# Altium PCB PCB1.PcbDoc
Units mil, origin at the board's own origin, x right, y up, seen from the top; angles counter-clockwise.
Board outline 1545 x 760 mil, 2 copper layers (Top Layer, Bottom Layer); 41 components, 50 nets, 203 pads, 69 vias.
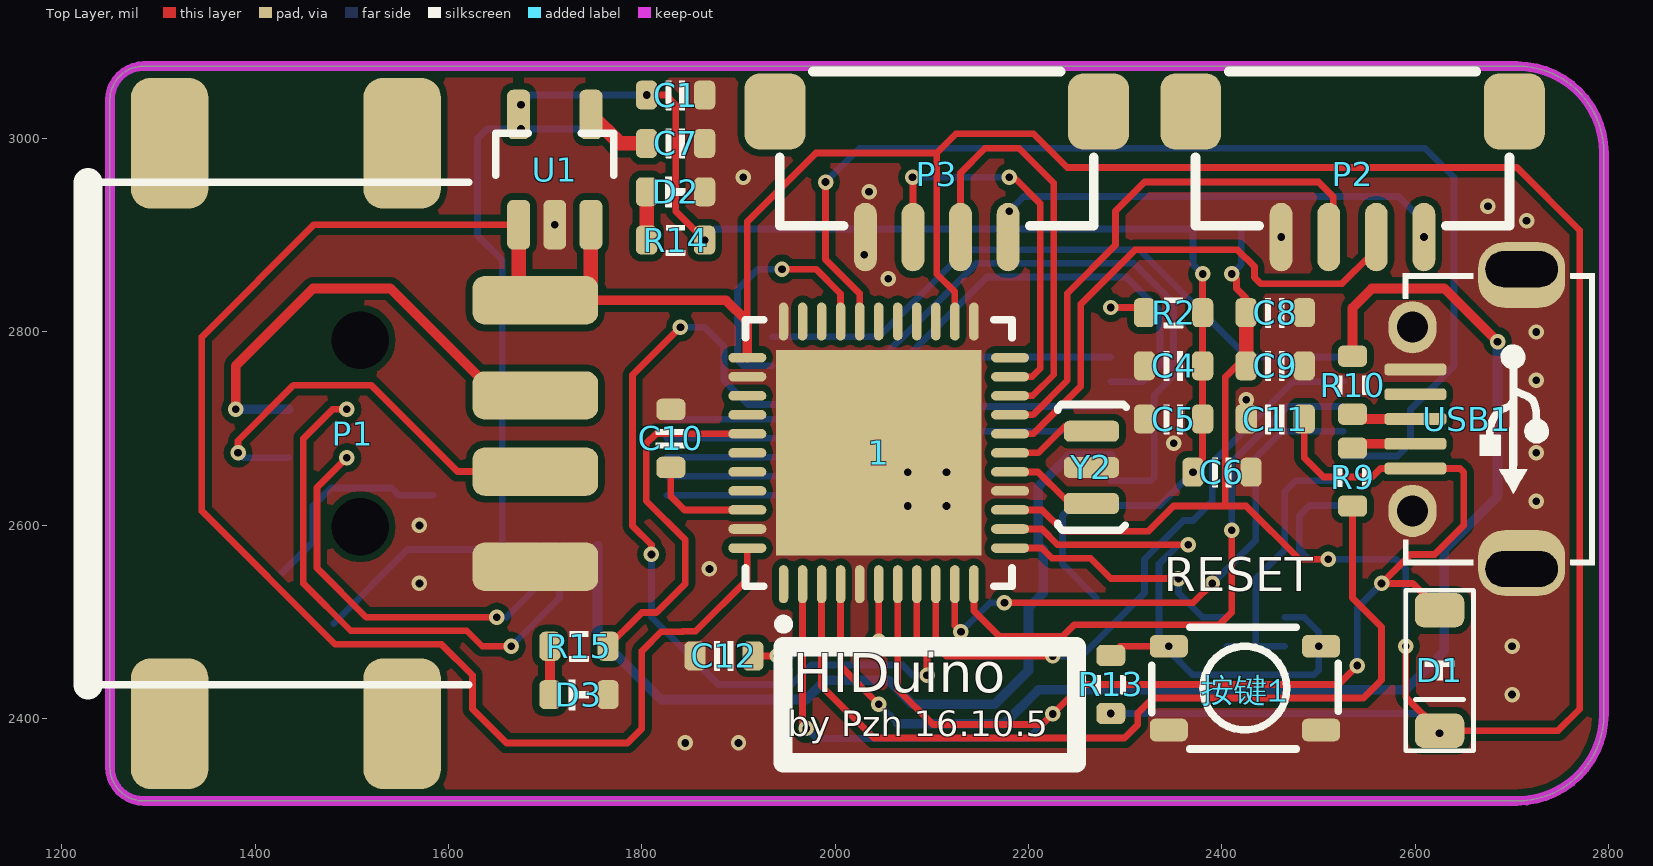
[diagram p0: Top Layer view]
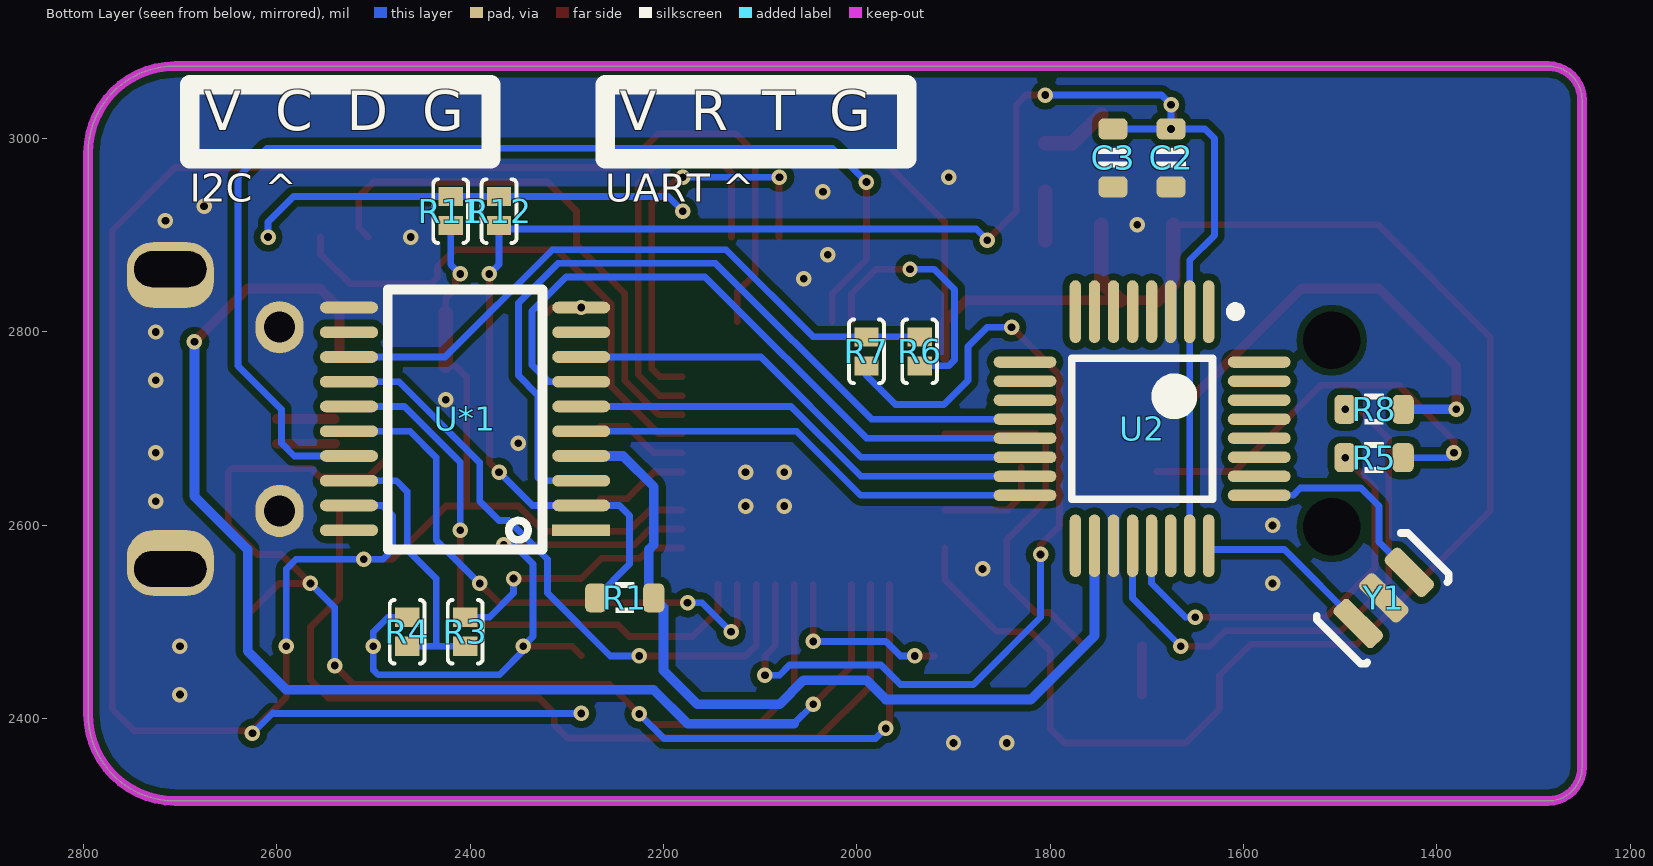
[diagram p1: Bottom Layer view, seen from below]
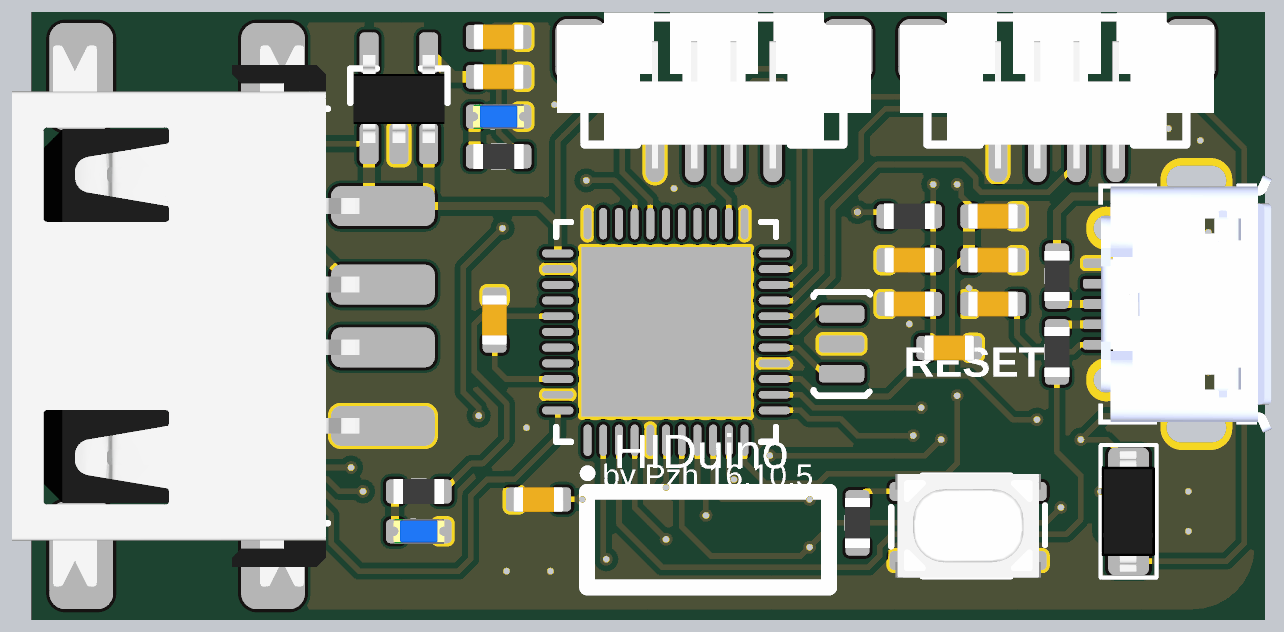
[diagram p2: 3D render of the assembled board from above, using the file's embedded part models]

## Layer stack, top to bottom
Top Solder: solder mask 0.4, Solder Resist, Dk 3.5
Top Layer: signal copper 1.4
Dielectric 1: dielectric 12.6, FR-4, Dk 4.8
Bottom Layer: signal copper 1.4
Bottom Solder: solder mask 0.4, Solder Resist, Dk 3.5

## Board outline
1285,2315 cw(c1285,2350) 1250,2350 1250,3040 cw(c1285,3040) 1285,3075 2705,3075 cw(c2705,2985) 2795,2985 2795,2405 cw(c2705,2405) 2705,2315

## Design rules (kind name [scope] priority, off if disabled: settings)
Clearance [All] p1: gap=7
ComponentClearance [All] p1: gap=0 collisioncheckmode=3 verticalgap=0 showdistances=FALSE
HoleSize [All] p1: absolutevalues=TRUE maxlimit=10000 minlimit=1 maxpercent=80.000 minpercent=20.000
MinimumSolderMaskSliver [All] p1: minsoldermaskwidth=1
PolygonConnect [All] p1: connectstyle=Direct reliefconductorwidth=10 reliefentries=4 polygonreliefangle="90 Angle" airgapwidth=10
RoutingVias [All] p1: holewidth=28 width=50 viastyle="Through Hole" minholewidth=28 minwidth=50 maxholewidth=28 maxwidth=50
SilkToSilkClearance [All] p1: silktosilkclearance=0
SilkToSolderMaskClearance [IsPad] p1: minsilkscreentomaskgap=0 clearancetoexposedcopper=TRUE
SolderMaskExpansion [All] p1: expansion=4
UnpouredPolygon [All] p1: allowunpoured=FALSE
Width [All] p1: maxlimit=10000 minlimit=7 preferedwidth=10
24 further rules are at their usual default settings.

## Components (designator, comment, footprint, x,y, rotation, side; value= is the part's Value field where it differs from the comment)
1 "ATmega32U4" QFN-44 2045,2675 r90 top
C1 "10uF" 0603-CAP 1835,3045 r180 top
C2 "0.1uF" 0603-CAP 1675,2980 r270 bottom
C3 "0.1uF" 0603-CAP 1735,2980 r270 bottom
C4 "0.1uF" 0603-CAP 2350,2765 r180 top
C5 "电容-0603" 0603-CAP 2350,2710 r180 top
C6 "0.1uF" 0603-CAP 2400,2655 r0 top
C7 "10nF" 0603-CAP 1835,2995 r180 top
C8 "4.7uF" 0603-CAP 2455,2820 r180 top
C9 "0.1uF" 0603-CAP 2455,2765 r180 top
C10 "0.1uF" 0603-CAP 1830,2690 r90 top
C11 "1uF" 0603-CAP 2455,2710 r0 top
C12 "0.1uF" 0603-CAP 1885,2465 r0 top
D1 "二极管-5819W" SOD-123 2625,2450 r270 top
D2 "LED-0603" 0603-LED-BLUE 1835,2945 r0 top
D3 "LED-0603" 0603-LED-BLUE 1735,2425 r0 top
P1 "USB-A" USB-SHORT 1375,2695 r180 top
P2 "HDR1x4_2.0" "接插件 4P" 2535,2910 r0 top
P3 "HDR1x4_2.0" "接插件 4P" 2105,2910 r0 top
R1 "2.2K" 0603-RES 2240,2525 r0 bottom
R2 "1K" 0603-RES 2350,2820 r180 top
R3 "电阻-0R" 0402-0R 2405,2490 r270 bottom
R4 "电阻-0R" 0402-0R 2465,2490 r270 bottom
R5 "22R" 0603-RES 1465,2670 r0 bottom
R6 "电阻-0R" 0402-0R 1935,2780 r90 bottom
R7 "电阻-0R" 0402-0R 1990,2780 r90 bottom
R8 "22R" 0603-RES 1465,2720 r0 bottom
R9 "22R" 0603-RES 2535,2650 r270 top
R10 "22R" 0603-RES 2535,2745 r90 top
R11 "电阻-0R" 0402-0R 2420,2925 r90 bottom
R12 "电阻-0R" 0402-0R 2370,2925 r90 bottom
R13 "4.7K" 0603-RES 2285,2435.5 r270 top
R14 "500R" 0603-RES 1835,2895 r180 top
R15 "500R" 0603-RES 1735,2475 r180 top
U1 "LP2992" SOT23-5 1710,2970 r90 top
U2 "MAX3421E" TQFP-32 1705,2700 r270 bottom
U*1 "TXS0108E" TSSOP-20 2285,2595 r0 bottom
USB1 "USB-Micro" USB_Micro-AB 2700,2710 r270 top
Y1 "12MHz" 晶振-3P 1455,2525 r135 bottom
Y2 "16MHz" 晶振-3P 2265,2660 r270 top
按键1 "Reset" SW-KEY2 2345,2475 r0 top

## Footprints (in the part's own frame and the unit in brackets; to place one, negate y for a bottom-side part, rotate by r counter-clockwise, add the part's x,y. Pads: shape width x height; smd on the part's side, far side on the other; paste and mask are expansions set on the pad)
0402-0R [mil] "选择焊盘"
  rect 19.68x25 smd: 1(-15,0) 2(15,0)
  silkscreen extent -33,-18 33,18
0603-CAP [mil]
  rrect50% 22x30 smd: 1(-30,0) 2(30,0)
  silkscreen extent -10,-15 10,15, body extent -31,-16 32,16, height 31
0603-LED-BLUE [mil]
  rrect50% 22x30 smd: 1(-30,0) 2(30,0)
  silkscreen extent -10,-16 10,16, body extent -32,-16 32,16, height 24
0603-RES [mil]
  rrect50% 22x30 smd: 1(-30,0) 2(30,0)
  silkscreen extent -10,-16 10,16, body extent -31,-16 31,16, height 18
QFN-44 [mm] "QFN, 44-Leads, Body 7.0x7.0mm (max), Pitch 0.50mm, IPC Low Density"
  oval 1x0.25 smd: 1(-3.45,2.5) 2(-3.45,2) 3(-3.45,1.5) 4(-3.45,1) 5(-3.45,0.5) 6(-3.45,0) 7(-3.45,-0.5) 8(-3.45,-1) 9(-3.45,-1.5) 10(-3.45,-2) 11(-3.45,-2.5) 23(3.45,-2.5) 24(3.45,-2) 25(3.45,-1.5) 26(3.45,-1) 27(3.45,-0.5) 28(3.45,0) 29(3.45,0.5) 30(3.45,1) 31(3.45,1.5) 32(3.45,2) 33(3.45,2.5)
  oval 0.25x1 smd: 12(-2.5,-3.45) 13(-2,-3.45) 14(-1.5,-3.45) 15(-1,-3.45) 16(-0.5,-3.45) 17(0,-3.45) 18(0.5,-3.45) 19(1,-3.45) 20(1.5,-3.45) 21(2,-3.45) 22(2.5,-3.45) 34(2.5,3.45) 35(2,3.45) 36(1.5,3.45) 37(1,3.45) 38(0.5,3.45) 39(0,3.45) 40(-0.5,3.45) 41(-1,3.45) 42(-1.5,3.45) 43(-2,3.45) 44(-2.5,3.45)
  rect 5.4x5.4 smd paste+0: ""(0,0)
  silkscreen extent -4.62,-3.5 3.5,3.5, body extent -3.5,-3.5 3.5,3.5, height 1
SOD-123 [mm]
  rrect50% 0.9x1.3 smd: 1(-1.583,0) 2(1.583,0)
  silkscreen extent -2.11,-0.89 2.11,0.89, body extent -1.92,-0.86 1.93,0.84, height 1.48
SOT23-5 [mm] "SOT23, 3-Leads, Body 3.1x3.0mm (max), Pitch 0.95mm, IPC Medium Density"
  rrect50% 1.3x0.6 smd: 1(-1.5,0.95) 2(-1.5,0) 3(-1.5,-0.95) 4(1.396,-0.95) 5(1.396,0.95)
  silkscreen extent -0.2,-1.55 0.9,1.55, body extent -1.48,-1.45 1.32,1.45, height 1.2
SW-KEY2 [mm]
  rrect50% 1x0.6 smd: 1(0,0) 1(4,0) 2(0,-2.2) 2(4,-2.2)
  silkscreen extent -0.45,-2.7 4.45,0.5, body extent -0.31,-2.74 4.33,0.56, height 2
TQFP-32 [mm]
  oval 1.65x0.3 smd: 1(-3.075,1.75) 2(-3.075,1.25) 3(-3.075,0.75) 4(-3.075,0.25) 5(-3.075,-0.25) 6(-3.075,-0.75) 7(-3.075,-1.25) 8(-3.075,-1.75) 17(3.075,-1.75) 18(3.075,-1.25) 19(3.075,-0.75) 20(3.075,-0.25) 21(3.075,0.25) 22(3.075,0.75) 23(3.075,1.25) 24(3.075,1.75)
  oval 0.3x1.65 smd: 9(-1.75,-3.075) 10(-1.25,-3.075) 11(-0.75,-3.075) 12(-0.25,-3.075) 13(0.25,-3.075) 14(0.75,-3.075) 15(1.25,-3.075) 16(1.75,-3.075) 25(1.75,3.075) 26(1.25,3.075) 27(0.75,3.075) 28(0.25,3.075) 29(-0.25,3.075) 30(-0.75,3.075) 31(-1.25,3.075) 32(-1.75,3.075)
  silkscreen extent -3.2,-1.85 1.85,2.57, body extent -2.5,-2.5 2.5,2.5, height 1.2
TSSOP-20 [mil]
  rect 60x12 smd: 1(0,0)
  oval 60x12 smd: 2(0,-25.59) 3(0,-51.18) 4(0,-76.77) 5(0,-102.36) 6(0,-127.95) 7(0,-153.54) 8(0,-179.13) 9(0,-204.72) 10(0,-230.32) 11(240.16,-230.32) 12(240.16,-204.72) 13(240.16,-179.13) 14(240.16,-153.54) 15(240.16,-127.95) 16(240.16,-102.36) 17(240.16,-76.77) 18(240.16,-51.18) 19(240.16,-25.59) 20(240.16,0)
  silkscreen extent 40,-249 200,20
USB-SHORT [mm]
  rrect50% 2.032x3.429 smd: 0(-4.5,7.625) 0(-4.5,-7.625) 0(1.608,7.625) 0(1.608,-7.625)
  rrect50% 3.302x1.27 smd: 1(-8,-3.5) 2(-8,-1) 3(-8,1) 4(-8,3.5)
  round 0.6 hole 1.5 unplated: MH1(-3.4,2.45) MH2(-3.4,-2.45)
  silkscreen extent -6.25,-6.6 3.75,6.6, body extent -7.25,-8.62 3.81,8.62, height 6.4
USB_Micro-AB [mil]
  rrect80% 68x90 hole 37 slot 75 at 90 deg copper offset 6,0 mask+0: 0(-155,10)
  oval 54x50 hole 32 mask+0: 0(-95,-103) 0(95,-103)
  rrect80% 68x90 hole 37 slot 75 at 90 deg copper offset -6,0 mask+0: 0(155,10)
  rrect50% 12x64 smd: 1(51.18,-100) 2(25.59,-100) 3(0,-100) 4(-25.59,-100) 5(-51.18,-100)
  silkscreen extent -151,-113 151,86, body extent -161,-109 161,104, height 108
"接插件 4P" [mm]
  rrect50% 1.6x2 smd: 0(-4.25,3) 0(4.25,3)
  oval 0.6x1.8 smd: 1(-1.875,-0.3) 2(-0.625,-0.3) 3(0.625,-0.3) 4(1.875,-0.3)
  silkscreen extent -4.13,0 4.13,4.05, body extent -5,-0.76 5,4.2, height 3.8
晶振-3P [mm] "贴片晶振"
  rrect50% 0.55x1.45 smd: 1(-0.95,0) 2(0,0) 3(0.95,0)
  silkscreen extent -1.65,-0.89 1.65,0.91, body extent -1.75,-0.75 1.75,0.75, height 0.3

## Part data
1: "MCU"
C1 C2 C3 C4 C6 C7 C8 C9 C10 C11 C12: library part 电容-0603, "Capacitor"
C5: "Capacitor"
D1: "40V"
D2 D3: "LED"
P2 P3: "Header"
R1 R2 R5 R8 R9 R10 R13 R14 R15: library part 电阻-0603, "Resistor"
R3 R4 R6 R7 R11 R12: "Resistor"
U1: "LDO"
U*1: "电平转换芯片"
USB1: "USB"
Y1 Y2: library part 晶振-3Pin, "村田贴片"
按键1: library part 按键-4Pin, "贴片轻触"

## Via types
v1: diameter 16, hole 8, Top Layer to Bottom Layer, tented both sides, 69 vias

## Nets (pads, with @x,y where several pads share a name; then routed paths per layer and width w, separated by ;. In a path a pad name is that pad's centre, name@x,y a point inside that pad or via, vN(x,y) a via of type N, cw(c..) or ccw(c..) an arc to the next point about the centre after c; other vN are vias at no path point)
3V3: C1.2 C2.1 C3.1 C4.1 C5.1 C6.1 R1.2 R2.1 R12.1 R14.1 U1.5 U2.2 U2.23 U*1.2 | length 1925.3
  Top Layer w7: U1.5@1672.6,3012.4 U1.5 ; v1(1805,3045) 1825,3045 1835,3035 1835,2925 v1(1865,2895) ; v1(2370,2655) 2380,2665 C5.1 C4.1 R2.1 v1(2380,2860)
  Bottom Layer w7: U2.23 U2.2 1655.79,2874.21 1630,2900 1630,3000 1640,3010 v1(1675,3010) ; C3.1 v1(1675,3010) ; v1(1805,3045) 1685,3045 v1(1675,3035) v1(1675,3010) ; v1(1865,2895) 1876.5,2906.5 R12.1@2370,2906.5 ; R1.2 2235,2560 2235,2610 2245.59,2620.59 U*1.2 2335.59,2620.59 v1(2370,2655) ; R12.1 R12.1@2370,2906.5 ; v1(2380,2860) 2370,2870 R12.1@2370,2906.5
5V: 1.14 1.24 1.34 1.44 C8.2 C9.2 D1.2 P1.1 R11.1 R13.2 U1.1 U1.3 U*1.19 | length 5121.9
  Top Layer w7: U1.1 1460.94,2910.94 1345,2795 1345,2615 1483,2477 1593,2477 1625,2445 1625,2410 1660,2375 1785,2375 1800,2390 1800,2470 1820,2490 1842.37,2490 1842.87,2490.5 1855.5,2490.5 1909.17,2544.17 1.44 ; 1909.17,2810.83 1909.17,2914.17 1980,2985 2105,2985 ; 1.24 2123.74,2841.26 2105,2860 2105,2985 ; 1.14 2214.06,2615.94 2236,2594 2324,2594 2350,2620 2405,2620 ; v1(2410,2860) 2415,2855 2415,2845 2425,2835 C8.2 ; C9.2 2415,2765 2403.5,2753.5 2403.5,2621.5 2405,2620 ; v1(2510,2565) 2480,2565 2425,2620 2405,2620 ; v1(2590,2475) 2590,2422.66 D1.2 2747.66,2387.66 2770,2410 2770,2905 2705,2970 2240,2970 2205,3005 2125,3005 2105,2985
  Top Layer w10: P1.1 1727.8,2832.8 1887.2,2832.8 1909.17,2810.83 1.34
  Top Layer w15: U1.1 1672.6,2850.16 P1.1 ; P1.1@1727.8,2832.8 1747.4,2852.4 U1.3 ; C9.2 C8.2
  Bottom Layer w7: v1(2285,2405.5) 2603.5,2405.5 2604,2406 v1(2625,2385) ; v1(2410,2860) 2420,2870 R11.1 ; U*1.19 2490.59,2620.59 2480,2610 2480,2575 2490,2565 v1(2510,2565) 2580,2565 2590,2555 v1(2590,2475)
A0: 1.36
A1: 1.37
ARX: 1.20 P3.3 | length 440.6
  Top Layer w7: P3.3 2129.61,2964.61 2155,2990 2190,2990 2226,2954 2226,2755.8 2204.26,2734.06 1.20
ATX: 1.21 P3.2 | length 410.8
  Top Layer w7: v1(2080,2960) 2080.39,2959.61 P3.2 ; v1(2180,2960) 2185,2960 2212,2933 2212,2762 2203.74,2753.74 1.21
  Bottom Layer w7: v1(2080,2960) v1(2180,2960)
D4: 1.25
D6: 1.27
D9: 1.29 U*1.17 | length 1204.7
  Top Layer w7: v1(1990,2955) 1990,2875 2025.31,2839.69 1.29
  Bottom Layer w7: v1(1990,2955) 2025,2990 2610,2990 2640,2960 2640,2765 2595,2720 2595,2685 2581.77,2671.77 U*1.17
D10: 1.30 R6.1 | length 266.1
  Top Layer w7: v1(1945,2865) 1980.2,2865 2005.63,2839.57 1.30
  Bottom Layer w7: R6.1 1905,2765 1899,2771 1899,2844 1920,2865 v1(1945,2865)
D11: 1.12 R3.1 | length 262.6
  Top Layer w7: 1.12 2213.63,2576.57 2224.2,2566 2264,2566 2285,2545 v1(2355,2545)
  Bottom Layer w7: v1(2355,2545) 2355,2530 2380,2505 R3.1
D12: 1.26
D13: 1.32
D17: 1.8 R7.1 | length 979.6
  Top Layer w7: v1(1810,2570) 1810,2580 1790.5,2599.5 1790.5,2755.5 v1(1840,2805) ; 1.8 2084.37,2475.63 2095,2465 v1(2095,2445)
  Bottom Layer w7: v1(1810,2570) 1810,2505 1879.5,2435.5 1955,2435.5 1975,2455.5 2069.5,2455.5 2080,2445 v1(2095,2445) ; v1(1840,2805) 1865,2805 1885,2785 1885,2750 1910,2725 1960,2725 1990,2755 R7.1
GND: 1. 1.5 1.15 1.23 1.33 1.35 1.43 C1.1 C2.2 C3.2 C4.2 C5.2 C6.2 C7.1 C8.1 C9.1 C10.2 C11.1 C12.1 D2.2 D3.2 P1.4 P2.1 P3.1 U1.2 U2.3 U2.19 U*1.11 USB1.0 USB1.5 Y1.2 Y2.2 按键1.2
  other v1: 1845,2375 1900,2375 2700,2425 2700,2475 1570,2540 1870,2555 1570,2600 2075,2620 2115,2620 2725,2625 2075,2655 2115,2655 2725,2675 2350,2685 2425,2730 2725,2750 2725,2800 2055,2855 2030,2880 2461.18,2898.19 1710,2910.94 2715,2915 2675,2930 2035,2945 1905,2960
LED: 1.38 R15.1 | length 377.1
  Top Layer w7: R15.1 1800,2510 1815,2510 1845,2540 1845,2585 1804.5,2625.5 1804.5,2684.5 1814.68,2694.68 1.38
MINT: R1.1 U2.18 U*1.4 | length 885.8
  Bottom Layer w10: U2.18 1754.21,2485.79 1820,2420 1970,2420 1990,2440 2055,2440 2080,2415 2165,2415 2200,2450 2200,2515 R1.1 2215,2530 2215,2575 2210,2580 2210,2640 2241.77,2671.77 U*1.4
MISO: 1.11 U*1.15 | length 609.7
  Top Layer w7: 1.11 2143.43,2511.57 2170,2485 2235,2485 2247.31,2497.31 2397.31,2497.31 2410,2510 v1(2410,2595)
  Bottom Layer w7: v1(2410,2595) 2410,2665 2467.95,2722.95 U*1.15
MMISO: U2.15 U*1.6 | length 488.8
  Bottom Layer w7: U2.15 1995.79,2650.79 2067.95,2722.95 U*1.6
MMOSI: U2.16 U*1.5 | length 486.4
  Bottom Layer w7: U2.16 1995.9,2631.1 2062.16,2697.36 U*1.5
MOSI: 1.10 U*1.16 | length 582.7
  Top Layer w7: 1.10 2123.74,2496.26 v1(2130,2490) ; v1(2175,2520) 2370,2520 v1(2390,2540)
  Bottom Layer w7: v1(2130,2490) 2160,2520 v1(2175,2520) ; v1(2390,2540) 2435,2585 2435,2670.2 2462.16,2697.36 U*1.16
MRST: U2.12 U*1.3 | length 842.5
  Bottom Layer w7: U2.12 1984.84,2709.84 2146,2871 2309,2871 2350,2830 2350,2755 2330,2735 2330,2650 2326.18,2646.18 U*1.3
MSCLK: U2.13 U*1.7 | length 707.6
  Bottom Layer w7: U2.13 1990.16,2690.16 2157,2857 2300.65,2857 2336,2821.65 2336,2766 2318.54,2748.54 U*1.7
MSS: U2.14 U*1.8 | length 501.9
  Bottom Layer w7: U2.14 1995.47,2670.47 2099.13,2774.13 U*1.8
Net1_3: 1.3 R9.2 | length 930.9
  Top Layer w7: 1.3 1985.94,2434.06 2040,2380 2299,2380 2313,2394 2313,2406 2328.5,2421.5 2546.5,2421.5 2565,2440 2565,2495 2535,2525 R9.2
Net1_4: 1.4 R10.2 | length 1338.7
  Top Layer w7: 1.4 2005.63,2454.37 v1(2045,2415)
  Top Layer w10: R10.2 2535,2825 2555,2845 2630,2845 v1(2685,2790)
  Bottom Layer w7: v1(2045,2415) 2065,2395
  Bottom Layer w10: 2065,2395 2175,2395 2210,2430 2590,2430 2630,2470 2630,2575 2685,2630 v1(2685,2790)
Net1_6: 1.6 C12.2 | length 190.4
  Top Layer w7: C12.2@1920,2465 v1(1940,2465) ; v1(2045,2480) 1.6
  Bottom Layer w7: v1(1940,2465) 1955,2465 1970,2480 v1(2045,2480)
Net1_16: 1.16 Y2.3 | length 95.7
  Top Layer w7: 1.16 2209.69,2655.31 2237.4,2627.6 Y2.3@2265,2627.6
Net1_17: 1.17 Y2.1 | length 95.5
  Top Layer w7: 1.17 2210,2675 2237.4,2702.4 Y2.1@2265,2702.4
Net1_42: 1.42 C10.1 | length 115
  Top Layer w7: C10.1 1830,2630 1844.06,2615.94 1.42
NetC7_2: C7.2 U1.4 | length 70
  Top Layer w15: U1.4 1777.35,2995 C7.2
NetD2_1: D2.1 R14.2 | length 50
  Top Layer w15: R14.2 D2.1
NetD3_1: D3.1 R15.2 | length 50
  Top Layer w10: D3.1 R15.2
NetP1_2: P1.2 R8.1 | length 488.9
  Top Layer w10: v1(1380,2720) 1380,2765 1460,2845 1540,2845 1650.63,2734.37 P1.2
  Bottom Layer w10: v1(1380,2720) R8.1
NetP1_3: P1.3 R5.1 | length 428.3
  Top Layer w7: v1(1382.5,2675) 1382.5,2687.5 1440,2745 1520,2745 1609.37,2655.63 P1.3
  Bottom Layer w7: v1@1387.5,2670 R5.1
NetR2_2: R2.2 U*1.10 | length 37.2
  Top Layer w7: v1(2285,2825.32) 2314.68,2825.32 R2.2
NetR5_2: R5.2 U2.21 | length 432.4
  Top Layer w7: v1(1495,2670) 1464.1,2639.1 1464.1,2555.9 1515,2505 v1(1650,2505)
  Bottom Layer w7: v1(1650,2505) 1660,2505 1695.16,2540.16 U2.21
NetR8_2: R8.2 U2.20 | length 573.9
  Top Layer w7: v1(1495,2720) 1480,2720 1450,2690 1450,2540 1499,2491 1619,2491 1635,2475 v1(1665,2475)
  Bottom Layer w7: v1(1665,2475) 1714.84,2524.84 U2.20
NetR9_1: R9.1 USB1.2 | length 60.6
  Top Layer w10: R9.1@2539.41,2684.41 USB1.2
NetR10_1: R10.1 USB1.3 | length 60
  Top Layer w10: R10.1@2540,2710 USB1.3
NetU2_24: U2.24 Y1.1 | length 188
  Bottom Layer w7: Y1.1 1557.89,2575 1632.17,2575 U2.24
NetU2_25: U2.25 Y1.3 | length 216.3
  Bottom Layer w7: Y1.3 1460,2582.89 1460,2620 1478.57,2638.57 1541.43,2638.57 1548.9,2631.1 U2.25
NRST: 1.13 R4.1 R13.1 按键1.1 | length 630.2
  Top Layer w7: 1.13 2213.74,2596.26 2230,2580 v1(2365,2580) ; R13.1 2294.5,2475 按键1.1@2340,2475
  Bottom Layer w7: v1(2365,2580) 2355,2580 2335,2560 2335,2485 v1(2345,2475) 2345,2470 2369.5,2445.5 2495,2445.5 2500,2450.5 v1(2500,2475) 2500,2490 2485,2505 R4.1
PWR: P2.4 P3.4 R11.2 R12.2 | length 461.5
  Bottom Layer w7: v1(2180,2925) 2195,2940 R12.2 R11.2 2582.64,2940 2608.82,2913.82 v1(2608.82,2898.19)
RST: R3.2 R4.2 U*1.18 | length 297.2
  Bottom Layer w7: R3.2 2435,2475 ; R4.2 2435,2475 ; U*1.18 2476.18,2646.18 2465,2635 2465,2575 2435,2545 2435,2475
SCL: 1.18 P2.3 | length 553.8
  Top Layer w7: 1.18 2204.68,2694.68 2254,2744 2254,2829 2310,2885 2416.16,2885 2433.5,2867.66 2433.5,2856.5 2440,2850 2524.21,2850 2554.61,2880.39 P2.3@2554.61,2898.19
SCLK: 1.9 U*1.14 | length 650.2
  Top Layer w7: 1.9 2104.06,2475.94 2115,2465 v1(2225,2465)
  Bottom Layer w7: v1(2225,2465) 2255,2465 2320,2530 2320,2565 2360,2605 2370,2605 2390,2625 2390,2665 2473.54,2748.54 U*1.14
SDA: 1.19 P2.2 | length 559.1
  Top Layer w7: 1.19 2204.37,2714.37 2240,2750 2240,2840 2290,2890 2290,2925 2320,2955 2500,2955 2515,2940 2515,2907.8 P2.2@2505.39,2898.19
SS: R6.2 R7.2 U*1.13 | length 673.4
  Bottom Layer w7: R6.2 2045,2795 2135,2885 2315,2885 2425.87,2774.13 U*1.13
VBUS: 1.2 1.7 C11.2 D1.1 USB1.1 | length 1587.5
  Top Layer w7: v1@1966.26,2396.26 1.2 ; 1.7 2064.68,2430.32 2101,2394 2214,2394 v1(2225,2405) 2255.5,2435.5 2520.5,2435.5 v1(2540,2455) ; C11.2 2485,2670 2505,2650 2555,2650 2563.82,2658.82 USB1.1 2646.18,2658.82 2650,2655 2650,2600 2620,2570 2595,2570 v1(2565,2540) 2597.34,2540 D1.1
  Bottom Layer w7: v1(1970,2390) 1980.5,2379.5 2199.5,2379.5 v1(2225,2405) ; v1(2540,2455) 2540,2515 v1(2565,2540)
pads on no net: 1.1 1.22 1.28 1.31 1.39 1.40 1.41 P1.0 P1.MH1 P1.MH2 P2.0 P3.0 U2.1 U2.4 U2.5 U2.6 U2.7 U2.8 U2.9 U2.10 U2.11 U2.17 U2.22 U2.26 U2.27 U2.28 U2.29 U2.30 U2.31 U2.32 U*1.1 U*1.9 U*1.12 U*1.20 USB1.4

## Polygon pours and split planes (outlines as drawn)
GND on Bottom Layer "Keep-Out Layer-No Net" (solid, remove dead copper, pour order 8): 2795.57,3081.01 2795.57,2306.01 1220.57,2306.01 1220.57,3081.01
GND on Top Layer "Keep-Out Layer-No Net" (solid, remove dead copper, pour order 4): 1225.11,3074.1 2800.11,3074.1 2800.11,2299.1 1225.11,2299.1

## Keep-outs
Keep-Out Layer:
  the board outline again, w10

## Silkscreen, mask and mechanical layers (free items; w line width, h text height)
Top Overlay:
  lines w20: 1946,2354.62 2249.55,2354.62 2249.55,2474.62 1946,2474.62 1946,2354.62
  text "RESET" at 2340,2520 h60
  text "HIDuino" at 1956,2414 h69
  text "by Pzh 16.10.5" at 1951,2373 h45
Bottom Overlay:
  lines w20: 1948.25,2979.16 2260,2979.16 2260,3055.68 1948.25,3055.68 1948.25,2979.16 ; 2378.25,2979.16 2378.25,3055.68 2690,3055.68 2690,2979.16 2378.25,2979.16
  text "V  R  T  G" at 2245,2995 h70
  text "V  C  D  G" at 2675,2995 h70
  text "UART ^" at 2260,2925 h50
  text "I2C ^" at 2690,2925 h50